# Altium PCB NODE.PcbDoc
Units mil, origin at the board's own origin, x right, y up, seen from the top; angles counter-clockwise.
Board outline 2180.03 x 2909.33 mil, 2 copper layers (Top Layer, Bottom Layer); 84 components, 58 nets, 273 pads, 85 vias.
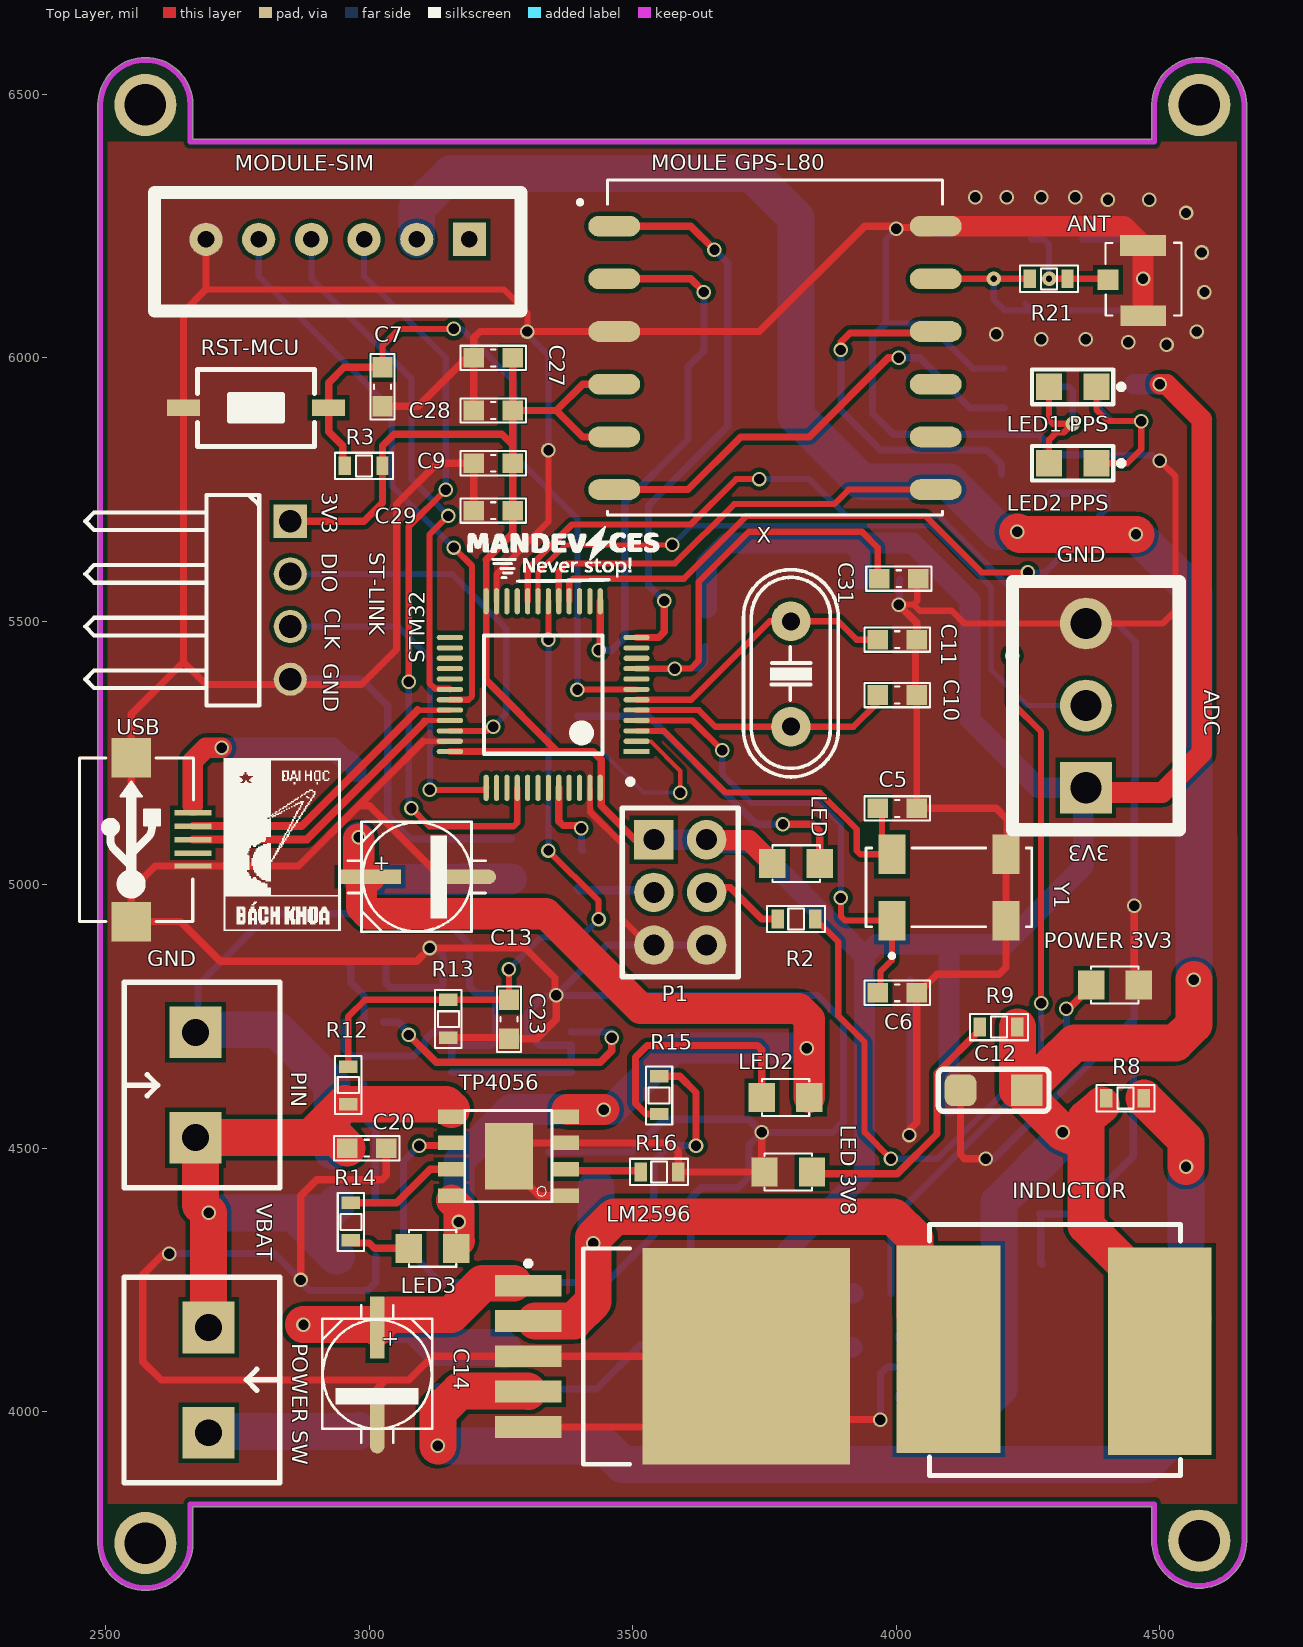
[diagram p0: Top Layer view]
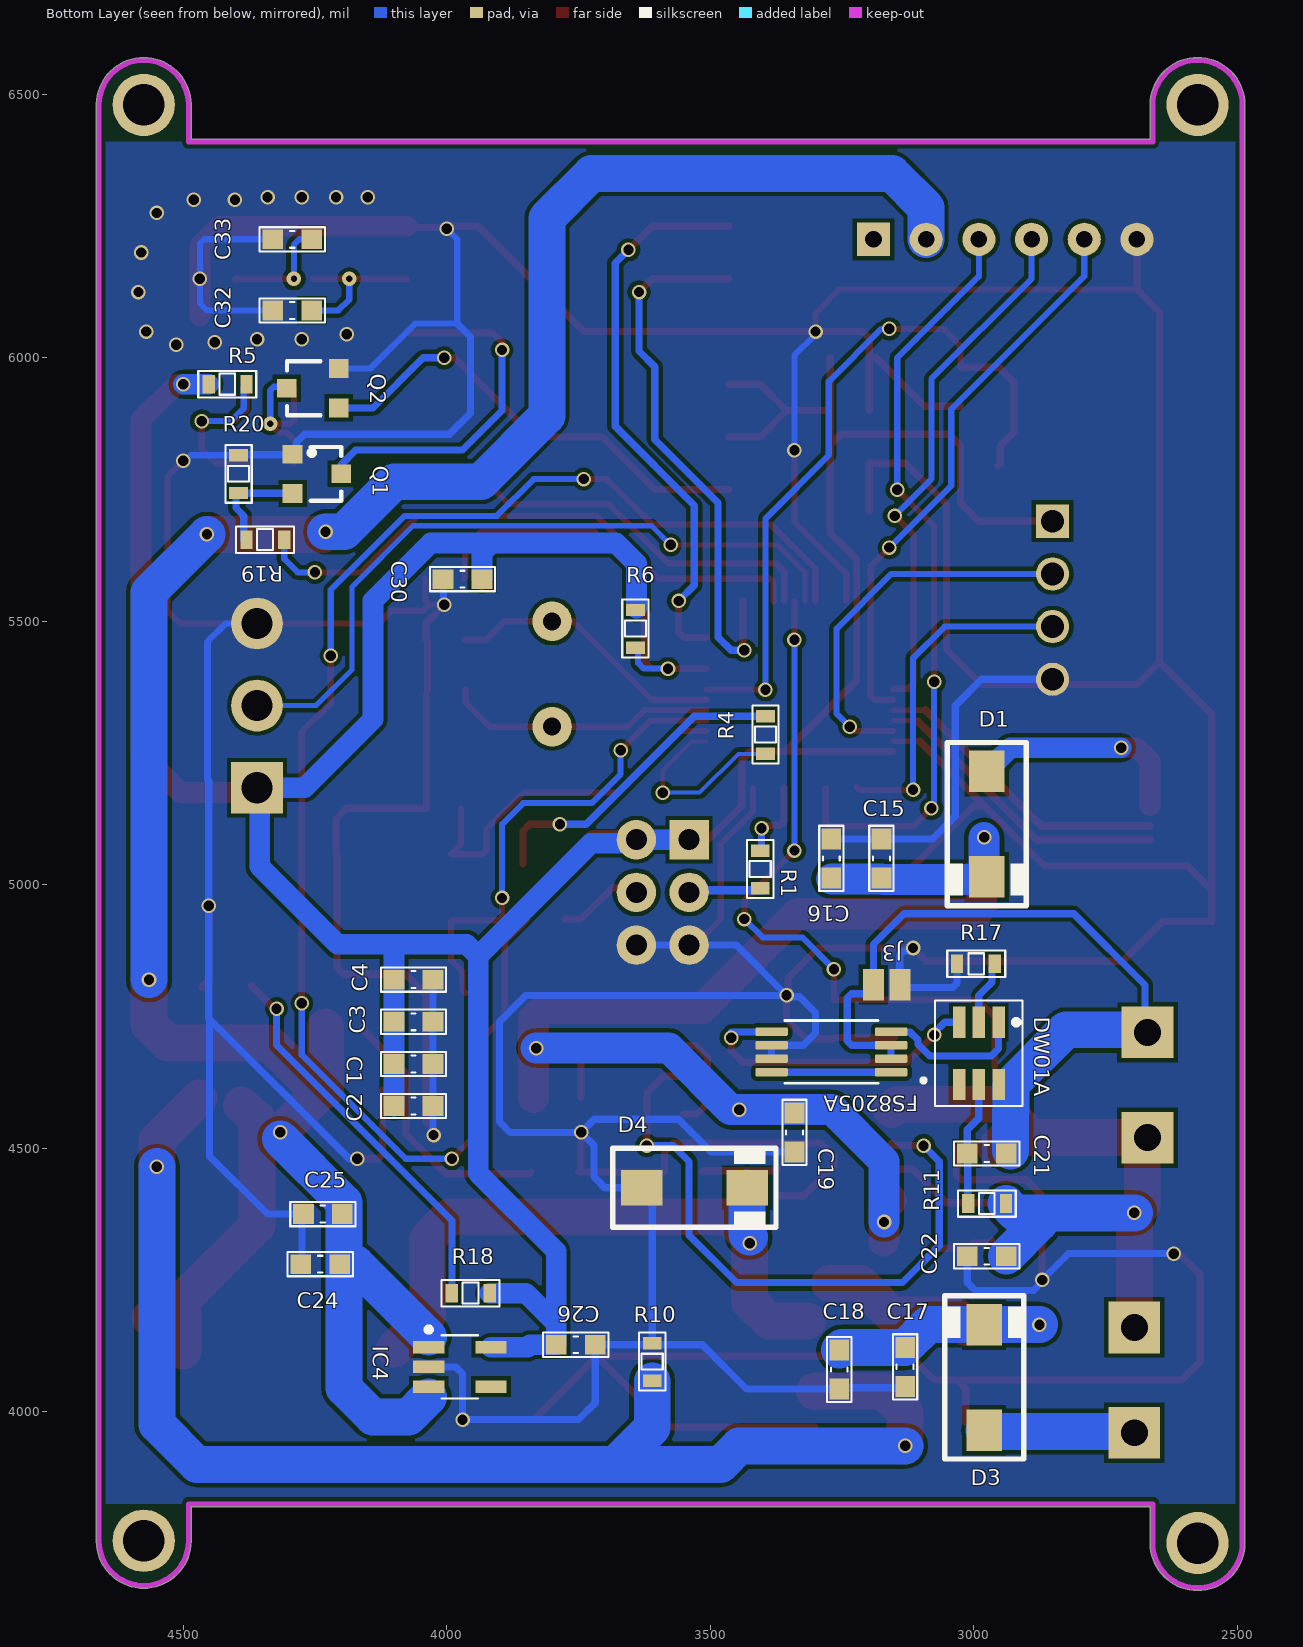
[diagram p1: Bottom Layer view, seen from below]
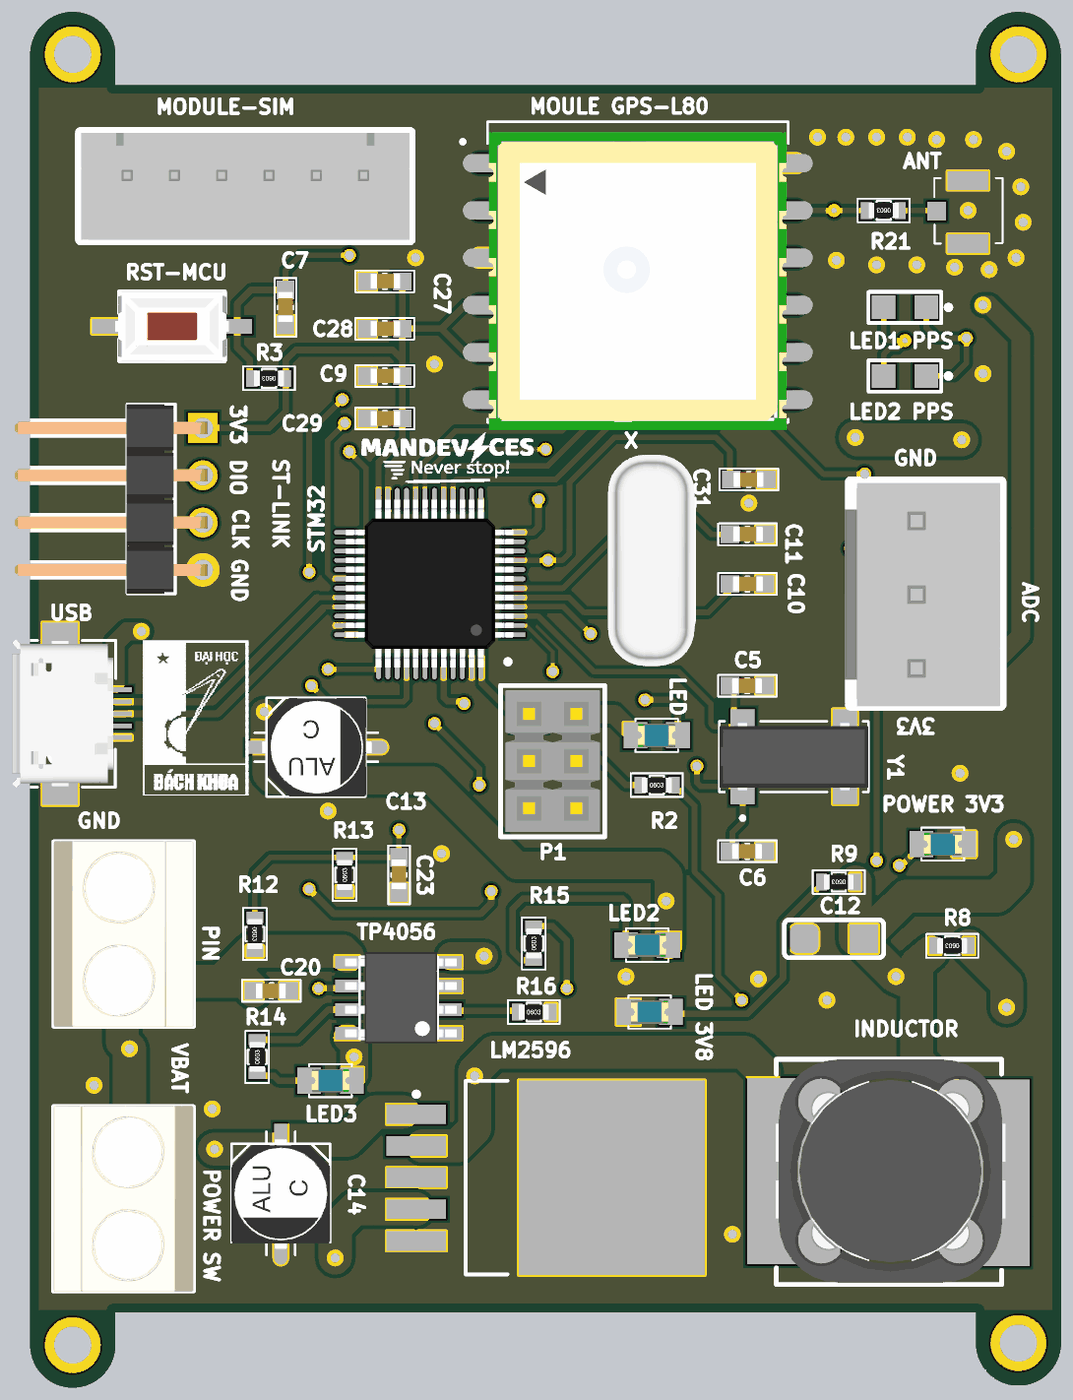
[diagram p2: 3D render of the assembled board from above, using the file's embedded part models]
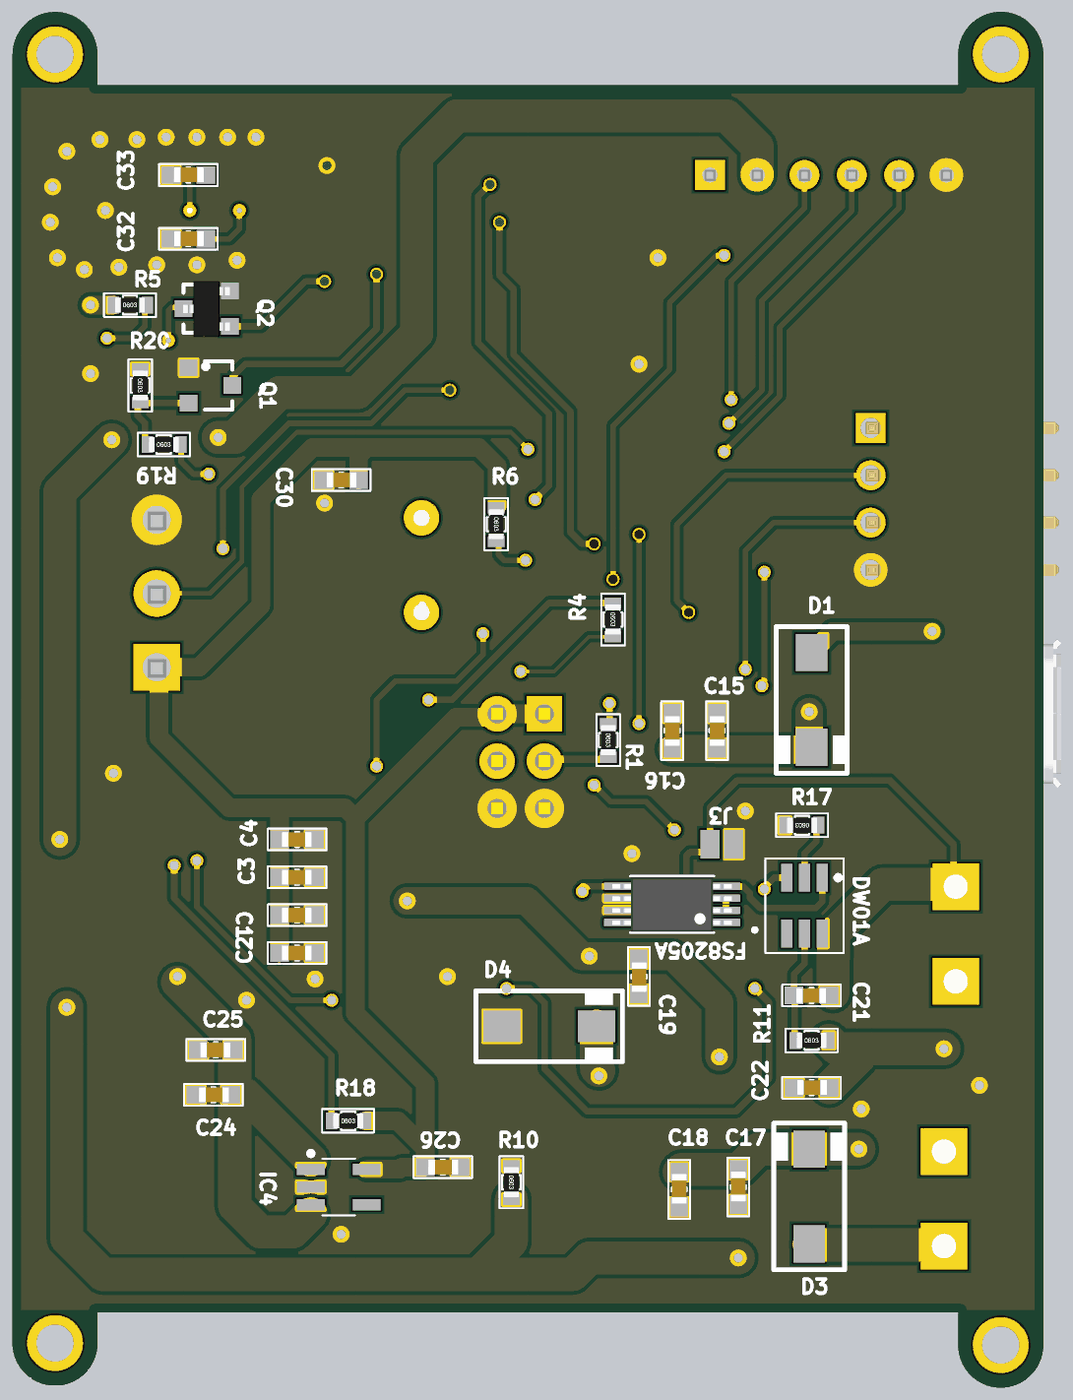
[diagram p3: 3D render of the assembled board from below, using the file's embedded part models]

## Layer stack, top to bottom
Top Solder: solder mask 0.4, Solder Resist, Dk 3.5
Top Layer: signal copper 1.4
Dielectric 1: dielectric 12.6, FR-4, Dk 4.8
Bottom Layer: signal copper 1.4
Bottom Solder: solder mask 0.4, Solder Resist, Dk 3.5

## Board outline
2484.99,3749.96 cw(c2490,3750) 2484.99,3750.16 2484.99,6480.65 cw(c2490,6480.65) 2484.99,6480.78 cw(c2575,6480) 2665.01,6480.74 cw(c2660,6480.7) 2665.01,6480.7 2665.01,6415.02 4484.98,6415.02 4484.98,6480.65 cw(c4490,6480.65) 4485.15,6481.93 cw(c4575,6480) 4664.85,6481.98 cw(c4660,6480.7) 4665.02,6480.7 4665.02,3754.35 cw(c4660,3754.35) 4665.01,3754.11 cw(c4575,3755) 4484.99,3754.06 cw(c4490,3754.3) 4484.98,3754.3 4484.98,3819.99 2665.01,3819.99 2665.01,3750.04 cw(c2660,3750.04) 2665.01,3749.77 cw(c2575,3750.7)

## Design rules (kind name [scope] priority, off if disabled: settings)
Clearance [All] p1: gap=7.87 ignorepadtopadclearanceinfootprint=TRUE
DiffPairsRouting [All] p1: maxlimit=10 minlimit=10 mostfreqgap=10 toplayer_minwidth=15 toplayer_maxwidth=15 toplayer_prefwidth=15 bottomlayer_minwidth=15 bottomlayer_maxwidth=15 bottomlayer_prefwidth=15 maxuncoupledlength=500
PolygonConnect [All] p1: connectstyle=Direct reliefconductorwidth=10 reliefentries=4 polygonreliefangle="90 Angle" airgapwidth=10
RoutingVias [All] p1: holewidth=11.81 width=27.56 viastyle="Through Hole" minholewidth=11.81 minwidth=27.56 maxholewidth=11.81 maxwidth=27.56
SolderMaskExpansion [All] p1: expansion=4
Width [All] p1: maxlimit=70 minlimit=7.87 preferedwidth=11.81 minimp=50.000000 maximp=50.000000 favimp=50.000000
29 further rules are at their usual default settings.

## Classes and differential pairs
component class 3.GPS: ANT C27 C28 C29 C33 "LED1 PPS" "LED2 PPS" "MOULE GPS-L80" Q1 Q2 R5 R19 R20 R21
component class 2.POWER_NODE: C12 C13 C14 C15 C16 C17 C18 C19 C20 C21 C22 C23 C24 C25 C26 D3 D4 DW01A FS8205A IC4 J3 L1 LED2 LED3 "LED 3V8" LM2596 PIN "POWER 3V3" R8 R9 R10 R11 R12 R13 R14 R15 R16 R17 R18 TP4056
component class 1.MCU_NODE: ADC C1 C2 C3 C4 C5 C6 C7 C9 C10 C11 C30 C31 CR D1 LED MODULE-SIM P1 R1 R2 R3 R4 R6 RST-MCU ST-LINK STM32 USB X Y1
differential pair USB: +USB_P -USB_N

## Components (designator, comment, footprint, x,y, rotation, side; value= is the part's Value field where it differs from the comment)
ADC "Header 3P VH3.96 Duc Thang" VH3.96M-3 4360,5262.05 r90 top (schematic designator H2)
ANT "IPX" IPXS 4418.22,6148.09 r180 top (schematic designator P2)
C1 "104,0603" CAP_0603 4063,4660 r0 bottom value=33p
C2 "104,0603" CAP_0603 4063,4580 r0 bottom value=33p
C3 "104,0603" CAP_0603 4063,4740 r0 bottom value=33p
C4 "104,0603" CAP_0603 4063,4820 r0 bottom value=33p
C5 "20pF,0603" CAP_0603 4001.82,5145 r180 top value=33p
C6 "20pF,0603" CAP_0603 4001.82,4795 r180 top value=33p
C7 "100nF,0603" CAP_0603 3025,5945 r90 top value=33p
C9 "104,0603" CAP_0603 3235,5800 r0 top value=33p
C10 "20pF,0603" CAP_0603 4001.82,5360 r0 top value=33p
C11 "20pF,0603" CAP_0603 4002,5465.16 r0 top value=33p
C12 "220uF" CAP_TANTALUM_3216 4185,4610 r180 top value=220uF,tantalum3216
C13 "470uF/63V,ALU-SMD-C" CAP-ALU-SMD-C 3091.47,5015 r0 top value="Cap 470uF/63V"
C14 "470uF/63V, ALU-SMD-C" CAP-ALU-SMD-C 3015,4070 r270 top value="Cap 470uF/63V"
C15 "4.7uF" CAP_0603 3175,5050 r270 bottom value=4.7uF,0603
C16 "4.7uF" CAP_0603 3270,5050 r270 bottom value=100nF,0603
C17 "4.7uF" CAP_0603 3130,4085 r90 bottom value=4.7uF,0603
C18 "4.7uF" CAP_0603 3255,4080 r90 bottom value=100nF,0603
C19 "100nF,0603" CAP_0603 3340,4530 r270 bottom value=33p
C20 "100nF,0603" CAP_0603 2995,4500 r180 top value=33p
C21 "100nF,0603" CAP_0603 2975,4490 r0 bottom value=33p
C22 "100nF,0603" CAP_0603 2975,4295 r180 bottom value=33p
C23 "100nF,0603" CAP_0603 3265,4745 r90 top value=33p
C24 "4.7uF" CAP_0603 4240,4280 r180 bottom
C25 "10nF" CAP_0603 4235,4375 r0 bottom value=10uF
C26 "10uF" CAP_0603 3755,4127 r180 bottom
C27 "4.7uF" CAP_0603 3235,6000 r0 top value=10uF,0603
C28 "4.7uF" CAP_0603 3235,5900 r0 top value=100nF,0603
C29 "4.7uF" CAP_0603 3235,5710 r0 top value=100nF,0603
C30 "1uF,0603" CAP_0603 3970,5580 r180 bottom value=33p
C31 "10nF,0603" CAP_0603 4005,5580.99 r180 top value=33p
C32 "106" CAP_0603 4292.98,6090 r180 bottom value=33p
C33 "106" CAP_0603 4293.08,6225 r180 bottom value=33p
D1 "M7" SMA 2975,5115 r270 bottom value=1N4007
D3 "M7" SMA 2980,4065 r90 bottom value=1N4007
D4 "SMA" SMA 3530,4425 r180 bottom
DW01A "DW01A" SOT23-6 2990,4680 r270 bottom (schematic designator IC2)
FS8205A "FS8205A" FS8205A 3270,4685 r0 bottom (schematic designator IC5)
IC4 "AP7335A-33W5-7" SOT23-5 3975,4085 r180 bottom
INDUCTOR "33uH" Inductor_SMD 4539.37,3878.78 r90 top value=220uH (schematic designator L1)
J3 "Jumper2" JUMPER2 3140,4810 r180 bottom
LED "LED" LED-0805-Blue 3765,5040 r0 top value="LED 3 ly Single Colour" (schematic designator LED1)
"LED1 PPS" "LED3" LED0805 4335,5945 r180 top (schematic designator LED5)
LED2 "LED" LED-0805-Blue 3835,4596.49 r180 top value="LED 3 ly Single Colour"
"LED2 PPS" "LED3" LED0805 4335,5800 r180 top (schematic designator LED4)
LED3 "LED" LED-0805-Blue 3165,4310 r180 top value="LED 3 ly Single Colour"
"LED 3V8" "3V8" LED-0805-Blue 3840,4455 r180 top value=Red (schematic designator PW1)
LM2596 "LM2596" TO-263 3537.83,4105 r0 top (schematic designator IC1)
MODULE-SIM "Header 6P 2.54 Duc Thang" XH2.54M-6 3190,6225 r180 top (schematic designator H1)
"MOULE GPS-L80" "L80-M39" XCVR_L80-M39 3770,6000 r0 top (schematic designator U3)
P1 "Header 3x2" "Header 3x2" 3540,5085.59 r270 top
PIN "JP2" KF2-5.08 2670,4620 r90 top (schematic designator J2)
"POWER 3V3" "LED 0805" LED-0805-Blue 4370,4810 r0 top value=Red (schematic designator PW2)
"POWER SW" "JP2" KF2-5.08 2695,4060 r270 top (schematic designator J4)
Q1 "2SC1815" SOT23 4246.26,5780 r270 bottom value=C1815
Q2 "2SC1815" SOT23-321 4254.21,5942.4 r90 bottom value=C1815
R1 "100k,0603" RES-SMD-0603 3405,5030 r270 bottom
R2 "100k,0603" RES-SMD-0603 3810,4935 r0 top
R3 "4k7,0603" RES-SMD-0603 2990,5795 r180 top
R4 "510R,0603" RES-SMD-0603 3395,5285 r270 bottom
R5 "330R,0603" RES-SMD-0603 4416.49,5950 r180 bottom
R6 "10R,0603" RES-SMD-0603 3641.82,5486.49 r270 bottom
R8 "10k,0603" RES-SMD-0603 4435,4595 r180 top value=10k
R9 "1k,0603" RES-SMD-0603 4195,4730 r180 top value=1k
R10 "4.7k,0603" RES-SMD-0603 3610,4095 r270 bottom value=3.3k
R11 "0.1k,0603" RES-SMD-0603 2975,4395 r180 bottom
R12 "30k,0603" RES-SMD-0603 2960,4620 r270 top
R13 "100k,0603" RES-SMD-0603 3150,4745 r90 top
R14 "1k,0603" RES-SMD-0603 2965,4360 r90 top
R15 "1k,0603" RES-SMD-0603 3549.95,4600 r90 top
R16 "1k2,0603" RES-SMD-0603 3550,4455 r0 top
R17 "1k,0603" RES-SMD-0603 2995,4850 r0 bottom
R18 "1k" RES-SMD-0603 3955,4225 r180 bottom
R19 "4k7,0603" RES-SMD-0603 4345,5655 r180 bottom
R20 "10k,0603" RES-SMD-0603 4395,5780 r270 bottom
R21 "0R,0603" RES-SMD-0603 4290,6150 r180 top
RST-MCU "SW" SW-SMD 2785,5905 r180 top value="SW chip 2 pin" (schematic designator SW1)
ST-LINK "Header4" JP4-D1C 2750,5340 r270 top (schematic designator C8)
STM32 "STM32" "LQFP 48" 3330,5360 r180 top (schematic designator U1)
TP4056 "TP4056" TP4056 3264,4485 r180 top (schematic designator IC3)
USB "USB-5" USB-M1 2665,5085.59 r90 top (schematic designator J1)
X "4Mhz" XT2 3800,5400 r270 top (schematic designator X1)
Y1 "MC-306_32.768K-E3" XTAL_MC-306_32.768K-E3 4100,4995 r90 top

## Footprints (in the part's own frame and the unit in brackets; to place one, negate y for a bottom-side part, rotate by r counter-clockwise, add the part's x,y. Pads: shape width x height; smd on the part's side, far side on the other; paste and mask are expansions set on the pad)
CAP-ALU-SMD-C [mm]
  rect 3x0.7 smd: 1(-2.286,0)
  oval 3x0.7 smd: 2(2.286,0)
  silkscreen extent -3.35,-2.65 3.28,2.65, body extent -2.95,-2.65 2.95,2.65, height 5.41
CAP_0603 [mm]
  rect 1x0.95 smd mask+0.076: 1(-0.94,0) 2(0.94,0)
  silkscreen extent -1.57,-0.58 1.57,0.58, body extent -0.77,-0.39 0.83,0.41, height 0.9
CAP_TANTALUM_3216 [mil]
  rect 60x60 smd: 1(-62.99,0)
  rrect50% 60x60 smd: 2(62.99,0)
  silkscreen extent -105,-40 105,40, body extent -67,-35 67,35, height 67
FS8205A [mm]
  rrect25% 1.56x0.4 smd: 1(-2.88,1.031) 2(-2.88,0.381) 3(-2.88,-0.269) 4(-2.88,-0.919) 5(2.88,-0.919) 6(2.88,-0.269) 7(2.88,0.381) 8(2.88,1.031)
  silkscreen extent -4.54,-1.46 2.25,1.57, body extent -3.2,-1.4 3.2,1.53, height 1.2
"Header 3x2" [mil] "Connector; Header; 6 Position; 2 Row; Solder Pad 35mil"
  rect 75x75 hole 40: 1(0,0)
  round 75 hole 40: 2(0,100) 3(100,0) 4(100,100) 5(200,0) 6(200,100)
  silkscreen extent -60,-60 260,160, body extent -50,-50 250,150, height 83
Inductor_SMD [mm]
  rect 10x5 smd: 1(6.096,11.176) 2(6,1)
  silkscreen extent 0,0 12.1,12.1, body extent 0.1,-0.2 12.1,12.14, height 7.15
IPXS [mm] "SOT 23 _ 1-3-2"
  rect 1x1 smd: 1(0.415,-0.01)
  rect 2.2x1 smd: 2(-1.273,-1.658) 3(-1.278,1.73)
  silkscreen extent -3.13,-1.79 0.53,1.73, body extent -2.83,-1.49 0.31,1.56, height 1.55
JP4-D1C [mm] "4 pins, 1 row, right angled, gold plating"
  rect 1.6x1.6 hole 1.1: 1(-8.89,2.54)
  round 1.6 hole 1.1: 2(-6.35,2.54) 3(-3.81,2.54) 4(-1.27,2.54)
  silkscreen extent -10.16,-7.34 0,1.04, body extent -10.16,-7.57 0,2.79, height 2.54
JUMPER2 [mil]
  rect 40x60 smd: 1(-50,0) 2(0,0)
KF2-5.08 [mm]
  rect 2.5x2.5 hole 1.3: 1(-2.54,0) 2(2.54,0)
  silkscreen extent -4.95,-4.08 4.95,3.43, body extent -5,-4.07 5,3.43, height 10
LED0805 [mil] "Chip Resistor; Body 2.0 x 1.3 mm (LxW typ)"
  rect 50x50 smd: 1(-45,0) 2(45,0)
  silkscreen extent -97,-33 77,33, body extent -60,-25 60,25, height 47
LED-0805-Blue [mil]
  rect 50x55 smd: 1(0,0) 2(90,0)
  silkscreen extent 0,-35 90,35, body extent 5,-25 85,25, height 43
"LQFP 48" [mm]
  rect 1.27x0.25 smd: 1(-4.498,2.725)
  oval 1.27x0.25 smd: 2(-4.498,2.225) 3(-4.498,1.725) 4(-4.498,1.225) 5(-4.498,0.725) 6(-4.498,0.225) 7(-4.498,-0.275) 8(-4.498,-0.775) 9(-4.498,-1.275) 10(-4.498,-1.775) 11(-4.498,-2.275) 12(-4.498,-2.775) 25(4.498,-2.775) 26(4.498,-2.275) 27(4.498,-1.775) 28(4.498,-1.275) 29(4.498,-0.775) 30(4.498,-0.275) 31(4.498,0.225) 32(4.498,0.725) 33(4.498,1.225) 34(4.498,1.725) 35(4.498,2.225) 36(4.498,2.725)
  oval 0.25x1.27 smd: 13(-2.75,-4.524) 14(-2.25,-4.524) 15(-1.75,-4.524) 16(-1.25,-4.524) 17(-0.75,-4.524) 18(-0.25,-4.524) 19(0.25,-4.524) 20(0.75,-4.524) 21(1.25,-4.524) 22(1.75,-4.524) 23(2.25,-4.524) 24(2.75,-4.524) 37(2.75,4.473) 38(2.25,4.473) 39(1.75,4.473) 40(1.25,4.473) 41(0.75,4.473) 42(0.25,4.473) 43(-0.25,4.473) 44(-0.75,4.473) 45(-1.25,4.473) 46(-1.75,4.473) 47(-2.25,4.473) 48(-2.75,4.473)
  silkscreen extent -4.33,-2.88 2.85,4.3, body extent -4.5,-4.53 4.5,4.47, height 1.5
RES-SMD-0603 [mm]
  rect 0.6x0.9 smd: 1(-0.889,0) 2(0.927,0)
  silkscreen extent -1.4,-0.64 1.4,0.64, body extent -0.8,-0.4 0.8,0.4, height 0.43
SMA [mm]
  rect 2x1.7 smd: 1(-2.544,0) 2(2.544,0)
  silkscreen extent -3.94,-1.9 3.94,1.91, body extent -2.87,-1.4 2.87,1.4, height 2.29
SOT23 [mm] "SOT-23; 3 Leads; Body 3.1 x 2.5 mm, inc. leads (LxW max), Alternate Lead Configuration"
  rect 0.9x0.95 smd: 1(-0.95,-1.175) 2(0,1.175) 3(0.95,-1.175)
  silkscreen extent -1.3,-0.38 1.3,1.18
SOT23-5 [mm] "SOT23, 5-Leads, Body 3.0x3.0mm (max), Pitch 0.95mm, IPC Medium Density"
  rect 1.5x0.6 smd: 1(-1.5,0.95) 2(-1.5,0) 3(-1.5,-0.95) 4(1.5,-0.95) 5(1.5,0.95)
  silkscreen extent -1.63,-1.52 0.87,1.92, body extent -1.75,-1.52 1.75,1.53, height 1.45
SOT23-6 [mm] "SOT23, 5-Leads, Body 3.0x3.0mm (max), Pitch 0.95mm, IPC Medium Density"
  rect 1.5x0.6 smd: 1(-1.5,0.95) 2(-1.5,0) 3(-1.5,-0.95) 4(1.5,-0.95) 5(1.5,0) 6(1.5,0.95)
  silkscreen extent -2.54,-2.11 2.54,2.11, body extent -1.75,-1.52 1.75,1.53, height 1.45
SOT23-321 [mm]
  rect 0.9x0.95 smd mask+0: 1(0.95,-1.25)
  rect 0.9x0.95 smd: 2(0,1.25) 3(-0.95,-1.25)
  silkscreen extent -1.3,-0.38 1.3,1.25, body extent -1.52,-1.23 1.48,1.27, height 1.06
SW-SMD [mm] "Switch SMD type"
  rect 1.6x0.8 smd: 1(-3.5,0) 2(3.5,0)
  silkscreen extent -2.82,-1.85 2.82,1.85, body extent -3.05,-1.85 3.05,1.85, height 2.5
TO-263 [mm]
  rect 3.2x1.05 smd: 1(-6,3.4) 2(-6,1.7) 3(-6,0) 4(-6,-1.7) 5(-6,-3.4)
  rect 10x10.45 smd: 6(4.5,0)
  silkscreen extent -6.12,-5.2 -1.1,5.2, body extent -6.58,-5.2 7.57,5.2, height 4.65
TP4056 [mm]
  rect 1.3x0.7 smd: 1(-2.75,1.905) 2(-2.75,0.635) 3(-2.75,-0.635) 4(-2.75,-1.905) 5(2.75,-1.905) 6(2.75,-0.635) 7(2.75,0.635) 8(2.75,1.905)
  rect 2.3x3.2 smd: 3(-0.025,0)
  silkscreen extent -2.1,-2.2 2.1,2.2, body extent -3.13,-2.45 2.87,2.45, height 1.75
USB-M1 [mil]
  rect 10x70 smd: 1(51.18,0) 2(25.59,0) 3(0,0) 4(-25.59,0) 5(-50,0)
  rect 74.8x74.8 smd: 5(-155.51,116.84) 5(155.51,116.84)
  silkscreen extent -155,-1 155,215, body extent -157,5 158,218, height 107
VH3.96M-3 [mm]
  rect 2.5x2.5 hole 1.5: 1(-1.98,0)
  round 2.5 hole 1.5: 2(1.98,0) 3(5.94,0)
  silkscreen extent -4,-4.5 7.96,3.54, body extent -4.08,-4.49 7.92,3.88, height 10.26
XCVR_L80-M39 [mm]
  oval 2.5x1 smd paste-2: 1(-7.75,6.35) 2(-7.75,3.81) 3(-7.75,1.27) 4(-7.75,-1.27) 5(-7.75,-3.81) 6(-7.75,-6.35) 7(7.75,-6.35) 8(7.75,-3.81) 9(7.75,-1.27) 10(7.75,1.27) 11(7.75,3.81) 12(7.75,6.35)
  silkscreen extent -9.5,-7.57 8.08,8.57, body extent -8,-8 8,8, height 7.05
XH2.54M-6 [mm]
  rect 1.6x1.6 hole 0.8: 1(0,0)
  round 1.6 hole 0.8: 2(2.54,0) 3(5.08,0) 4(7.62,0) 5(10.16,0) 6(12.7,0)
  silkscreen extent -2.48,-2.26 15.18,3.46, body extent -2.48,-2.26 15.18,3.48, height 6.91
XT2 [mil] "Footpin for Crystal 2 pin"
  round 75 hole 34: 1(-100,0) 2(100,0)
  silkscreen extent -198,-90 195,90, body extent -233,-93 213,90, height 138
XTAL_MC-306_32.768K-E3 [mm]
  rect 1.9x1.3 smd: 1(-1.6,2.75) 2(-1.6,-2.75) 3(1.6,-2.75) 4(1.6,2.75)
  silkscreen extent -3.4,-4 1.9,4, body extent -1.85,-4 1.85,4, height 2.54

## Part data
ADC MODULE-SIM: "C?m", Chung_Loai=C?m, Don_Vi=Con
  ADC: Ma_Hang=MH001292, Ten_Linh_Kien="Header 3P XH2.54-3P Ð?c Th?ng"
  MODULE-SIM: Ma_Hang=MH001972, Ten_Linh_Kien="Header 6P XH2.54-6P Ð?c Th?ng"
ANT: library part IPXSx66, "Antenna GSM GPS", Manufacturer="TE Connectivity AMP Connectors", Package=SMD, Part Number=2334884-1, Category=Connectors, User_Description="UMCC MICRO-COAX RECEPTACLE, GEN"
C1 C2 C3 C4 C5 C6 C7 C9 C10 C11 C19 C20 C21 C22 C23 C30 C31 C32 C33: library part CapSMD, "Capacitor", LatestRevisionDate=17-Jul-2002, LatestRevisionNote="Re-released for DXP Platform.", PackageReference=RAD-0.3, Published=8-Jun-2000, Publisher="Altium Limited"
C12: library part CP5, "220µF Molded Tantalum Polymer Capacitor 16V 2917 (7343 Metric) 40mOhm @ 100kHz", Manufacturer="AVX Corporation", Package=2917, Part Number=TCME227M016R0040E, Category=CAPACITOR, User_Description="CAP TANT POLY 220UF 16V 2917"
C13 C14: library part CP3, "Cap 470uF/63V"
C15 C16 C17 C18 C24 C27 C28 C29: library part C, "4.7µF ±10% 35V Ceramic Capacitor X5R 0805 (2012 Metric)", Manufacturer="Samsung Electro-Mechanics", Package=0805, Part Number=CL21A475KLCLQNC, Category=CAPACITOR, User_Description="CAP CER 4.7UF 35V X5R 0805"
C25 C26: library part C, "Cap SMD", Manufacturer="Samsung Electro-Mechanics", Package=0805, Part Number=CL21A106KPFNNNG, Category=CAPACITOR, User_Description="CAP CER 10UF 10V X5R 0805"
D1 D3: library part D1A, "Diode 1A"
D4: library part "Diode Zener", "Zener Diode", LatestRevisionDate=17-Jul-2002, LatestRevisionNote="Re-released for DXP Platform.", PackageReference=DIODE-0.7, Published=8-Jun-2000, Publisher="Altium Limited"
DW01A: "One Cell Lithium-ion/Polymer Battery Protection IC"
IC4: Package=SOT23-5, Part Number=AP7335A-33W5-7
INDUCTOR: library part L1, "22µH Shielded Inductor 1.65A 96mOhm Max Nonstandard", Manufacturer="Bourns Inc.", Package=SMD, Part Number=SRR0745A-220M, Category=INDUCTORS, User_Description="FIXED IND 22UH 1.65A 96 MOHM SMD"
J3: "Jumper, 2-Pin"
LED LED2 LED3: "LED Single colour Green and Red"
"LED1 PPS" "LED2 PPS": library part LED0805, "LED SMD 0805"
"LED 3V8" "POWER 3V3": library part LED, "LED RED DIFFUSED 0805 SMD", Manufacturer="OSRAM Opto Semiconductors Inc.", Package=0805, Part Number="LS R976-NR-1", Category="LED SMD", User_Description="LED RED DIFFUSED 0805 SMD"
LM2596: library part LM2576, "LM2576"
"MOULE GPS-L80": "L80 is an ultra compact GPS POT (Patch on Top) module with an embedded 15.0mm × 15.0mm × 4.0mm patch antenna.", Package=None, Availability=Warning, Check_prices=https://www.snapeda.com/parts/L80-M39/Quectel/view-part/51186/?ref=eda, MF=Quectel, MP=L80-M39, Price=None, Purchase-URL=https://pricing.snapeda.com/search/part/L80-M39/?ref=eda, SnapEDA_Link=https://www.snapeda.com/parts/L80-M39/Quectel/view-part/51186/?ref=snap
P1: "Header, 6-Pin, 2-Row", LatestRevisionDate=17-Jul-2002, LatestRevisionNote="Re-released for DXP Platform.", Publisher="Altium Limited"
PIN "POWER SW": "WR-PHD 2.54 mm Angled Socket Header", Manufacturer="W¨¹rth Elektronik eiSos GmbH", partNo=613002143121, ComponentLink1 Description=Manufacturer, ComponentLink1URL=http://www.we-online.com, ComponentLink2 Description=Datasheet, ComponentLink2URL=http://katalog.we-online.de/em/datasheet/6130xx143121.pdf, Created by="Karrer Zheng", Created Date="29 March 2013", NoPins=02
Q1 Q2: "NPN 600mW, ECB"
  Q1: =C828
  Q2: =C2383
R1 R2 R3 R4 R5 R6 R11 R12 R13 R14 R15 R16 R17 R19 R20 R21: library part "Resistor - SMD", "Resistor SMD", Manufacturer="Generic Components", Class=Passive, Published=08/06/2000, Publisher="Altium Hobart Technology Centre"
R8: library part R, "RES SMD 10K OHM 1% 1/8W 0805", Manufacturer=Yageo, Package=0805, Part Number=RC0805FR-0710KL, Category=RESISTORS, User_Description="RES SMD 10K OHM 1% 1/8W 0805"
R9 R18: library part R, "Resistor 1/4W", Manufacturer=Yageo, Package=0805, Part Number=RC0805FR-071KL, Category=RESISTORS, User_Description="RES SMD 1K OHM 1% 1/8W 0805"
R10: library part R, "RES SMD 3.3K OHM 1% 1/8W 0805", Manufacturer=Yageo, Package=0805, Part Number=RC0805FR-073K3L, Category=RESISTORS, User_Description="RES SMD 3.3K OHM 1% 1/8W 0805"
RST-MCU: library part SW2, "Switch button 2 pin"
ST-LINK: "Header IDC, 4 x 1 Pin Vertical 2.54mm Pitch (Non-Boxed, Male)", Manufacturer="W¨¹rth Elektronik eiSos GmbH", partNo=613002143121, ComponentLink1 Description=Manufacturer, ComponentLink1URL=http://www.we-online.com, ComponentLink2 Description=Datasheet, ComponentLink2URL=http://katalog.we-online.de/em/datasheet/6130xx143121.pdf, Created by="Karrer Zheng", Created Date="29 March 2013", NoPins=02
STM32: library part STM32F103C8T6, "STM32 ARM-based 32-bit MCU with 64 Kbytes Flash, 64-pin LQFP, Industrial Temperature"
TP4056: "Complete single cell Li-Ion battery with a constant current / constant voltage linear charger"
USB: Manufacturer=FCI, Manufacturer Part Number=10118193-0001LF, Supplier Part Number 1=609-4616-1-ND, .Checked PCB=RF, .Checked SCH=MM, .Creator=MM, Category="Connectors, Interconnects", ComponentLink1Description=http://portal.fciconnect.com/Comergent//fci/drawing/10118193.pdf, ComponentLink1URL=http://portal.fciconnect.com/Comergent//fci/drawing/10118193.pdf, Connector Type="USB - micro B", Features="Shielded, Solder Retention", Gender=Receptacle, Ingress Protection=-, Mounting Type="Surface Mount, Right Angle, Horizontal", Number of Contacts=5, Packaging="Cut Tape (CT)", Pricing 1="1=0.46, 10=0.433, 25=0.3712, 50=0.3156, 100=0.3032, 250=0.27224, 500=0.25988 (USD)", RoHS="RoHS Compliant", Specifications="USB 2.0", Stock 1=28642, Supplier 1=Digi-Key
X: library part XT2, "Crystal For all Crystal 2pin."
Y1: "CRYSTAL 32.7680KHZ 6PF SMD", Package="NON STANDARD-4 EPSON", Availability="In Stock", Check_prices=https://www.snapeda.com/parts/MC-306%2032.768K-E3/EPSON/view-part/?ref=eda, MF=EPSON, MP="MC-306 32.768K-E3", Price=None, Purchase-URL="https://pricing.snapeda.com/search/part/MC-306 32.768K-E3/?ref=eda", SnapEDA_Link=https://www.snapeda.com/parts/MC-306%2032.768K-E3/EPSON/view-part/?ref=snap

## Free pads (board coordinates)
  round 118.11 hole 78.74: 0(2575,3750.7) 0(2575,6480) 0(4575,3755) 0(4575,6480)

## Via types
v1: diameter 27.56, hole 19.68, Top Layer to Bottom Layer, 82 vias
v2: diameter 27.56, hole 11.81, Top Layer to Bottom Layer, 3 vias

## Nets (pads, with @x,y where several pads share a name; then routed paths per layer and width w, separated by ;. In a path a pad name is that pad's centre, name@x,y a point inside that pad or via, vN(x,y) a via of type N, cw(c..) or ccw(c..) an arc to the next point about the centre after c; other vN are vias at no path point)
3V3: "MOULE GPS-L80.4" "MOULE GPS-L80.5" ADC.1 C1.2 C2.2 C3.2 C4.2 C9.2 C26.1 C27.2 C28.2 C29.2 C30.2 IC4.5 LED.1 P1.1 P1.2 R3.1 R5.1 R6.1 R18.2 ST-LINK.1 STM32.24 STM32.36 STM32.48 | length 7162.2
  Top Layer w11.81: 3221.73,5388.27 STM32.24 3221.73,5616.73
  Top Layer w13.78: ST-LINK.1 2990,5690 3025,5725 R3.1 3025,5833.39 3046.62,5855 3252,5855 3272,5835 ; STM32.36 3357.27,5252.73 ; 3221.73,5388.27 3357.27,5252.73 ; 3221.73,5616.73 3272,5667 C29.2 C9.2 3272,5835 ; C27.2 C28.2 ; 3464.88,5850 3405,5850 3355,5900 ; 3464.88,5950 3405,5950 3355,5900 ; P1.1 3504.41,5085.59 3440.24,5149.76 3440.24,5237.5 3425,5252.73 3357.27,5252.73 ; 3272,5835 C28.2 ; C28.2 3355,5900
  Top Layer w39.37: P1.2 3640.96,5084.63 3720.37,5084.63 LED.1 ; ADC.1 4369.09,5175 4505,5175 4580,5250 4580,5883.01 4513.01,5950 v1(4500,5950)
  Bottom Layer w39.37: P1.1 P1.2 3646.82,5078.77 3726.16,5078.77 3940,4864.93 ; R6.1@3640,5525 3640,5610 3678.82,5648.82 3915,5648.82 ; IC4.5 3846.53,4122.4 3841.93,4127 C26.1 3792,4167 ; R18.2 3850,4225 3792,4167 ; C30.2 3933,5630.82 3915,5648.82 ; C2.2 C1.2 C3.2 C4.2 4100,4886.93 ; ADC.1 4269.97,5184.09 4140,5314.07 4140,5539.07 4030.25,5648.82 3915,5648.82 ; ADC.1@4369.09,5184.09 4355,5170 4355,5035 4206.93,4886.93 4100,4886.93 ; R5.1 v1(4500,5950) ; 3792,4167 3792,4304.32 3940,4452.32 3940,4864.93 ; 3940,4864.93 3962,4886.93 4100,4886.93
3V8: C12.1 C24.2 C25.1 IC4.1 IC4.3 INDUCTOR.2 MODULE-SIM.2 R8.2 R9.1 | length 5162.9
  Top Layer w70: R9.1 4230,4610 C12.1@4240.98,4605 ; v1(4230,5670) 4235,5665 v1(4455,5665) ; R8.2@4390,4581.7 4360,4556.48 4360,4510.46 ; INDUCTOR.2@4562.87,4177.87 INDUCTOR.2 4500,4213.43 4360,4353.43 4360,4510.46 ; v1(4565,4820) 4565,4735 4530,4700 4337.99,4700 4247.06,4610.95 C12.1@4240.98,4605 ; C12.1@4240.98,4605 v1(4315.98,4530) 4360,4510.46
  Bottom Layer w70: MODULE-SIM.2 3090,6285 3155,6350 3725,6350 3810,6265 3810,5890 3935,5765 4100,5765 4195,5670 v1(4230,5670) ; 4034.06,4028.19 4072.24,3990 4140,3990 4195,4045 C24.2@4195,4280 ; 4034.06,4141.81 4172.24,4280 C24.2@4195,4280 ; v1@4315.98,4518 4195,4397.02 C24.2@4195,4280 ; v1(4455,5665) 4565,5555 v1(4565,4820)
5V: C13.1 C15.2 C16.2 C19.1 D1.2 LED2.1 LED3.1 TP4056.4 TP4056.8 | length 2611.3
  Top Layer w59.06: C13.1@2980,5020 v1@2980,5087 ; C13.1 2990.91,5015 2985,5009.09 2985,4958.06 2998.06,4945 3335,4945 3515,4765 3815,4765 3835,4745 LED2.1 ; TP4056.8@3155.73,4401.22 3170,4386.95 v1(3170,4360) 3170,4325 LED3.1@3170.73,4324.27 ; TP4056.4@3375,4573.15 v1(3445,4573.15)
  Bottom Layer w59.06: v1(2980,5090) 2980,5009.84 3171.84,5009.84 3175,5011 C16.2@3270,5011 ; v1(3170,4360) 3170,4475.03 3268.12,4573.15 3340,4573.15 v1(3445,4573.15) 3461.42,4573.15 3578.27,4690 v1(3830,4690)
ADC2: ADC.2 STM32.19 | length 1364.5
  Top Layer w9.84: STM32.19 3320.16,5592.79 3325.92,5598.56 3372.36,5645 v1(3575,5645)
  Bottom Layer w9.84: v1(3575,5645) 3611.3,5681.3 4063.7,5681.3 4180,5565 4180,5408 4248,5340 ADC.2
ANT: MODULE-SIM.1
BOOT0: R1.1 STM32.44 | length 155.3
  Top Layer w13.78: STM32.44 3359.53,5120.47 3367.6,5112.4 3397.6,5112.4 v1(3402.5,5107.5)
  Bottom Layer w13.78: v1(3402.5,5107.5) 3402.5,5067.5 R1.1
BOOT1: R2.2 STM32.20 | length 2925.4
  Top Layer w11.81: STM32.20 3300.47,5599.56 3384.65,5683.73 3609.89,5683.73 3696.16,5770 v1(3740,5770) ; R2.2 3890,4891.49 3890,4751.25 3940,4701.25 3940,4530 v1(3990,4480) ; v1(4220,5435) 4220,5345 4275,5290 v1(4275,4775)
  Bottom Layer w11.81: v1(3740,5770) 3835,5770 3905,5700 4080,5700 4220,5560 v1(4220,5435) ; v1(3990,4480) 4078.01,4480 4275,4676.99 v1(4275,4775)
EX_ANT: "MOULE GPS-L80.11" C32.2 R21.2 | length 314.7
  Top Layer w11.81: 4076.25,6148.87 4077.38,6150 v2(4185,6150) R21.2
  Bottom Layer w11.81: v2(4185,6150) 4185,6110.67 4205.67,6090 C32.2 ; C32.2@4245.1,6102.8 C32.2@4257.9,6090
GND: "LED 3V8.2" "MOULE GPS-L80.3" "MOULE GPS-L80.12" "POWER 3V3.2" ADC.3 ANT.2 ANT.3 C1.1 C2.1 C3.1 C4.1 C5.1 C6.1 C7.1 C9.1 C10.2 C11.2 C12.2 C13.2 C14.2 C15.1 C16.1 C17.1 C18.1 C19.2 C20.1 C22.1 C23.1 C24.1 C25.2 C26.2 C27.1 C28.1 C29.1 C30.1 C31.1 C32.1 C33.1 D4.1 FS8205A.6 FS8205A.7 IC4.2 J3.2 LM2596.3 LM2596.5 LM2596.6 MODULE-SIM.6 P1.5 P1.6 Q1.1 Q2.1 R10.1 R13.1 R16.2 R17.2 R20.1 RST-MCU.2 ST-LINK.4 STM32.23 STM32.35 STM32.47 TP4056.1 TP4056.3 USB.5 Y1.2 Y1.3 | length 22594.8
  Top Layer w9.84: 3102.42,5272.42 STM32.35
  Top Layer w11.81: 2690,6130 3255,6130 3300,6085 v1(3300,6050) ; STM32.23 3241.42,5590 3340,5688.58 v1(3340,5825) ; STM32.47 3418.58,5139.05 3480,5077.63 3480,4935 3529.41,4885.59 P1.5 ; v1(4005,5531.16) 4005.59,5531.75 4033.08,5531.75 ; C5.1 C10.2 ; C31.1 4040,5578.99 4040,5538.67 4033.08,5531.75 ; v1(4500,5805) 4530,5775 4530,5520 4505.91,5495.91 ADC.3 4129.09,5495.91 4105,5520 4044.83,5520 4033.08,5531.75
  Top Layer w13.78: v1(2620,4300) 2610,4300 2570,4260 2570,4095 2605,4060 3031.49,4060 ; MODULE-SIM.6 2690,6130 2647.2,6087.2 RST-MCU.2 2647.2,5422.8 ; v1(2870,4250) 2870,4410 2900,4440 3023.93,4440 3032,4448.07 C20.1 ; C14.2 3015,4043.51 3031.49,4060 ; C7.1 3093,5908 3185,6000 C27.1 ; 3102.42,5272.42 3025,5195 2979.76,5149.76 ; R13.1 3263,4710 C23.1 3318,4708 3355,4745 v1(3355,4790) 3352.36,4792.64 3352.36,4823.01 3295.38,4880 v1(3115,4880) 3090,4855 2717.2,4855 2642.13,4930.08 2548.16,4930.08 2548.16,4990 ; C13.2 3135,5015 3000.24,5149.76 2979.76,5149.76 ; C29.1 C9.1 3129.1,5800 3051.58,5722.48 3051.58,5446.58 2985,5380 2690,5380 2647.2,5422.8 ; C28.1 C27.1 ; LM2596.5 3581.14,3971.14 LM2596.6 ; TP4056.1 3322.28,4410 3265,4467.28 3265,4485 3290,4510 3372.27,4510 3569.87,4510 3586.48,4493.39 R16.2 3750,4455 3745,4460 v1(3745,4530) ; v1(3970,3985) 3835,3985 LM2596.6 ; v1(4000,6245) 4002.5,6247.5 4072.62,6247.5 4075.12,6250 ; v1@4000,6250 3940,6250 3740,6050 3464.88,6050 v1(3300,6050) 3210,6050 3198,6038 C27.1 ; v1(4005,5531.16) 4039,5497.16 C11.2 4036.5,5462.66 C10.2@4036.5,5370 ; v1(4025,4525) 4025,4535 4038.82,4548.82 C6.1 4042.5,4795 4077.5,4830 4195,4830 4208.27,4843.27 Y1.2 Y1.3 4210,5059.72 4210,5125 4190,5145 C5.1 ; C12.2 4122.01,4487.99 4129.97,4480.03 v1(4170,4480.03) ; v1(4451.49,4960) 4451.49,4818.51 4460,4810 4465,4805 ; 2548.16,4990 2548.16,5241.1 2548.16,5323.75 2647.2,5422.8 ; 2548.16,4990 2593.75,5035.59 2665,5035.59 2865.59,5035.59 2979.76,5149.76 ; 3031.49,4060 3075,4060 3120,4105 LM2596.3 LM2596.6
  Top Layer w39.37: 4075.12,6250 4431.7,6250 ANT.2 4468.44,6213.37 v1(4468.44,6150) ANT.3@4468.44,6080.1
  Bottom Layer w11.81: v1(3300,6050) 3300,6044.67 3340,6004.67 v1(3340,5825) ; v1(4000,6245) 3980,6225 3980,6065 4060,6065 4145.2,5979.8 Q2.1 ; C32.1 4455,6090 4468.44,6103.44 v1(4468.44,6150) 4468.44,6216.56 4460,6225 4352.98,6225 ; ADC.3 4419.09,5495.91 4454.09,5460.91 ; R20.1 4485.74,5815 4495.74,5805 v1(4500,5805)
  Bottom Layer w13.78: v1@2625,4300 2820,4300 v1(2870,4250) 2870,4246.27 2886.27,4230 2997,4230 3012,4245 C22.1 ; ST-LINK.4 2985,5390 3035,5340 3035,5130 3078,5087 C15.1 C16.1 ; R17.2 3031.49,4813.07 3039.56,4805 3135,4805 J3.2 3140,4866.93 3131.93,4875 v1@3123.73,4875 ; C17.1 3132.5,4045.5 3252.5,4045.5 C18.1 3431,4043 3515,4127 3607,4127 R10.1 ; C19.2 3497.88,4493 3559.88,4555 3720,4555 v1(3745,4530) ; FS8205A.7 FS8205A.6 3323.07,4695.59 3300,4718.66 3300,4756.93 3330.44,4787.36 3352.36,4787.36 v1(3355,4790) ; P1.6 P1.5 3450.59,4885.59 v1(3355,4790) ; 3980,6065 3955,6040 3955,5895 3995,5855 4270,5855 4285,5840 4285,5824.92 Q1.1 4293.72,5816.2 4393.8,5816.2 R20.1 ; v1@4006,5531 4006,5579 C30.1 ; v1(4025,4525) 4026,4526 C2.1 C1.1 C3.1 C4.1 ; IC4.2 3983.07,4085 3970,4071.93 v1(3970,3985) 3750,3985 3718,4017 C26.2 3613,4127 R10.1 ; v1(4170,4480.03) 4185.03,4480.03 4450,4745 ; C24.1 4274.5,4282.5 4274.5,4372.5 C25.2 4340,4375 4450,4485 4450,4745 ; 4454.09,5460.91 4454.09,5199.09 4451.49,5196.49 v1(4451.49,4960) 4451.49,4746.49 4450,4745 ; v1(3355,4790) 3850,4790 3900,4740 3900,4550 3880,4530 v1(3745,4530) ; R10.1 3610,4404.84 D4.1 3700,4425 3720.64,4445.64 3720.64,4505.64 v1(3745,4530)
  other v1: 4513.01,6025 4440,6030 4275,6035 4360,6035 4190,6044.67 4570,6050 4585,6125 4580,6200 4550,6275 4401.88,6300 4480,6300 4150,6305 4210,6305 4275,6305 4340,6305
LED: R4.2 STM32.2 | length 373
  Top Layer w7.87: STM32.2 3507.48,5272.04 3534.42,5272.04 3590,5216.46 v1(3590,5175)
  Bottom Layer w7.87: R4.2 3446.49,5248.51 3520,5175 v1(3590,5175)
NetC7_2: C7.2 R3.2 RST-MCU.1 STM32.7 | length 1377.7
  Top Layer w11.81: C7.2 3025,6023 3057,6055 v1(3160,6055) ; v1(3395,5370) 3395.84,5370.84 STM32.7
  Top Layer w13.78: R3.2 2949.41,5799.09 2949.41,5833.38 2922.8,5860 RST-MCU.1 2922.8,5952.8 2952,5982 C7.2
  Bottom Layer w11.81: v1(3160,6055) 3175,6055 3275,5955 3275,5815 3395,5695 v1(3395,5370)
NetC10_1: C10.1 STM32.5 X.2 | length 513.8
  Top Layer w11.81: STM32.5 3625.32,5331.47 3656.79,5300 X.2 3918.78,5300 3963.78,5345 3963.78,5368.96 C10.1@3964.82,5370
NetC11_1: C11.1 STM32.6 X.1 | length 534
  Top Layer w11.81: STM32.6 3611.16,5351.16 3760,5500 X.1 3890,5500 3924.84,5465.16 C11.1
NetC14_1: C14.1 C17.2 C18.2 D3.2 LM2596.1 | length 837
  Top Layer w70: v1(2875,4165.16) 3009.84,4165.16 C14.1 3015,4162.83 3036.22,4184.06 3155.19,4184.06 3214.83,4243.69 LM2596.1@3273.62,4243.69
  Bottom Layer w70: v1(2875,4165.16) D3.2 3086.84,4165.16 C17.2 3250,4122 C18.2
NetC21_1: C21.1 DW01A.6 FS8205A.2 FS8205A.3 J3.1 PIN.2 | length 1443.7
  Bottom Layer w13.78: PIN.2 2674.76,4724.76 2674.76,4809.76 2810,4945 3131.93,4945 3190,4886.93 J3.1 3190,4806.21 3203.11,4793.1 3231.93,4793.1 3240,4785.03 3240,4703.66 3231.93,4695.59 FS8205A.3 FS8205A.2
  Bottom Layer w70: PIN.2@2674.76,4724.76 2825,4724.76 2928.82,4620.94 2928.82,4570.97 2930,4569.79 C21.1@2930,4495
NetC21_2: C21.2 DW01A.5 R11.1 | length 235.9
  Bottom Layer w13.78: DW01A.5 2990,4557.12 3012,4535.12 C21.2 3011,4489 3011,4396 R11.1
NetC23_2: C23.2 R12.1 R13.2 STM32.18 | length 1315.1
  Top Layer w11.81: R12.1 2960,4750 2992,4782 C23.2 ; C23.2@3265,4790 v1(3265,4840) ; v1@3339.84,5465.16 STM32.18 ; v1(3340,5065) 3435,4970 v1(3435,4935)
  Top Layer w13.78: v1@3339.84,5465.16 v1(3340,5465)
  Bottom Layer w11.81: v1(3265,4840) 3325,4900 3400,4900 v1(3435,4935) ; v1(3340,5065) v1(3340,5465)
NetC33_2: ANT.1 C33.2 R21.1 | length 215.6
  Top Layer w11.81: v2(4290,6150) R21.1 4400.37,6150 ANT.1
  Bottom Layer w11.81: C33.2 4280,6225 4290,6215 v2(4290,6150)
NetD1_1: D1.1 USB.1 | length 427.6
  Top Layer w39.37: 2665,5149.76 2665,5235 2690,5260 v1(2720,5260)
  Bottom Layer w39.37: v1(2720,5260) 2930.16,5260 2955.32,5234.84 2961.22,5234.84 2975,5221.06 D1.1
NetD3_1: "POWER SW.2" D3.1 | length 287.5
  Bottom Layer w70: 2695,3960 2697.42,3962.42 2978.46,3962.42 2980,3963.96 D3.1
NetD4_2: D4.2 INDUCTOR.1 LM2596.2 | length 1223.3
  Top Layer w70: LM2596.2@3315,4171.93 3388.17,4171.93 3425,4208.76 v1(3425,4320) 3425,4330 3465,4370 3995,4370 4035.94,4329.06 4035.94,4182.2 INDUCTOR.1
  Bottom Layer w70: v1@3425,4331.26 3429.84,4336.1 D4.2
NetIC1_4: LM2596.4 R8.1 R10.2 | length 2558.1
  Top Layer w70: v1(3130,3935) 3130,3998.33 3171.01,4039.33 3300.35,4039.33 LM2596.4 ; R8.1 4550,4515 v1(4550,4465)
  Bottom Layer w70: v1(3130,3935) 3445,3935 3480,3900 3680,3900 ; R10.2 3610,3970 3680,3900 ; v1(4550,4465) 4550,3976.01 4473.99,3900 3680,3900
NetIC2_1: DW01A.1 FS8205A.4 | length 284.2
  Bottom Layer w13.78: DW01A.1 2952.6,4688.86 2966.46,4675 3083.37,4675 3105.67,4697.3 3105.67,4705.96 3120.06,4720.35 3155.79,4720.35 FS8205A.4
NetIC2_2: DW01A.2 R17.1 | length 123.4
  Bottom Layer w13.78: R17.1 2964.92,4845.08 2964.92,4815.08 2990,4790 DW01A.2
NetIC2_3: DW01A.3 FS8205A.5 | length 587.4
  Top Layer w13.78: v1(3075,4715) 3126.93,4663.07 3438.07,4663.07 3460,4685 v1(3460,4710)
  Bottom Layer w13.78: DW01A.3 3054.67,4739.06 3075,4718.73 v1(3075,4715) ; FS8205A.5 3383.98,4720.59 3459.41,4720.59 3460,4720 v1(3460,4710)
NetIC3_2: R16.1 TP4056.2 | length 144.8
  Top Layer w13.78: TP4056.2 3374.77,4457.5 3512.49,4457.5 R16.1
NetIC3_6: R15.2 TP4056.6 | length 1222.4
  Top Layer w13.78: v1(3095,4505) 3150.73,4505 TP4056.6 ; R15.2 3589.22,4636.49 3620,4605.71 v1(3620,4505)
  Bottom Layer w13.78: v1(3095,4505) 3065,4475 3065,4315 3135,4245 3450,4245 3540,4335 3540,4475 3570,4505 v1(3620,4505)
NetIC3_7: R14.2 TP4056.7 | length 217
  Top Layer w13.78: R14.2 3052.02,4396.49 3115.54,4460 TP4056.7
NetIC5_1: FS8205A.1 FS8205A.8 | length 226.8
  Bottom Layer w13.78: FS8205A.1 FS8205A.8
NetLED1_2: LED.2 R4.1 | length 612.4
  Top Layer w13.78: v1(3785,5115) 3842.24,5115 3855,5102.24 LED.2
  Bottom Layer w13.78: R4.1 3530,5320 3735,5115 v1(3785,5115)
NetLED2_2: LED2.2 R15.1 | length 483.8
  Top Layer w13.78: R15.1 3525,4565 3505,4585 3505,4672.44 3527.56,4695 3736.93,4695 3745,4686.93 LED2.2
NetLED3_2: LED3.2 R14.1 | length 116.2
  Top Layer w13.78: R14.1 2969.92,4320.08 2999.92,4320.08 3010,4310 LED3.2
NetLED4_1: "LED1 PPS.1" "LED2 PPS.1" R5.2 | length 419.2
  Top Layer w11.81: 4380,5800 4438.35,5800 4465,5826.65 v1(4465,5880) 4401.92,5880 4380,5901.92 4380,5945
  Bottom Layer w11.81: R5.2 4385,5945 4385,5904.56 4409.56,5880 v1@4460,5880
NetLED4_2: "LED1 PPS.2" "LED2 PPS.2" Q2.2 | length 308.7
  Top Layer w11.81: 4290,5800 4290,5845 4303.35,5858.35 4318.35,5858.35 v2(4335,5875) ; 4290,5945 4290,5881.92 4296.92,5875 v2@4330.74,5875
  Bottom Layer w11.81: Q2.2@4304.41,5942.4 Q2.2 4306.02,5945 4328.08,5945 4335,5938.08 v2(4335,5875)
NetP1_3: P1.3 R1.2 | length 150.7
  Bottom Layer w15.75: R1.2@3395,4993.51 3398.93,4989.57 3536.02,4989.57 P1.3 P1.3@3538.29,4983.88
NetP1_4: P1.4 R2.1 | length 163.7
  Top Layer w13.78: P1.4 3649.41,4995 3685,4995 3745,4935 R2.1
NetPW1_1: "LED 3V8.1" R9.2 | length 506.7
  Top Layer w13.78: 3840,4455 3843.54,4451.46 4001.82,4451.46 4077.24,4526.88 4077.24,4642.82 4158.51,4724.09 R9.2
NetPW2_1: "POWER 3V3.1" R18.1 | length 745
  Top Layer w13.78: v1(4322.99,4765) 4325.63,4767.64 4330.14,4767.64 4370,4807.5 4370,4810
  Bottom Layer w13.78: R18.1 3990,4362.76 4322.99,4695.75 v1(4322.99,4765)
NetQ1_2: "MOULE GPS-L80.10" Q1.2 | length 683.3
  Top Layer w13.78: v1(3895,6015) 3895,6030 3912.23,6047.23 4072.35,6047.23 4075.12,6050
  Bottom Layer w13.78: v1(3895,6015) 3895,5900 3970,5825 4172.4,5825 4200,5797.4 Q1.2
NetQ1_3: Q1.3 R19.1 R20.2 | length 199.7
  Bottom Layer w13.78: Q1.3 4292.98,5743.05 4394.54,5743.05 R20.2 4395.08,5743.51 4400,5738.59 4400,5715 4385,5700 R19.1@4385,5655
NetR19_2: R19.2 STM32.16 | length 1113.6
  Top Layer w11.81: STM32.16 3379.59,5538.48 3379.59,5573.84 3386.74,5580.99 3597.15,5580.99 3716.16,5700 4055,5700 4162.21,5592.79 v1(4250,5592.79) v1@4255,5592.79
  Bottom Layer w11.81: v1(4250,5592.79) 4282.79,5592.79 4308.51,5618.51 R19.2
NetU1_12: "MOULE GPS-L80.1" STM32.12 | length 1075.8
  Top Layer w13.78: 3464.88,6250 3610,6250 v1(3655,6205) ; STM32.12 3549.15,5469.27 3559.88,5480 v1(3559.88,5538.67)
  Bottom Layer w13.78: v1(3559.88,5538.67) 3530,5568.54 3530,5720 3680,5870 3680,6180 v1(3655,6205)
NetU1_13: "MOULE GPS-L80.2" STM32.13 | length 1052.4
  Top Layer w13.78: v1(3435,5445) 3435,5448.73 3438.27,5452 STM32.13 ; 3464.88,6150 3610,6150 v1(3635,6125)
  Bottom Layer w13.78: v1(3435,5445) 3460,5445 3485,5470 3485,5725 3605,5845 3605,5983.18 3635,6013.18 v1(3635,6125)
NetU1_17: "MOULE GPS-L80.7" STM32.17 | length 836.4
  Top Layer w11.81: STM32.17 3359.53,5594.53 3375,5610 3580,5610 3692.48,5722.48 3882.48,5722.48 3910,5750 4075.12,5750
PC14: C5.2 STM32.3 Y1.4 | length 699.8
  Top Layer w11.81: STM32.3 3558.85,5292.1 3675.96,5175 3855,5175 3925,5105 3925,5065 3932.01,5057.99 Y1.4 3973,5076.72 C5.2@3973,5145
PC15: C6.2 STM32.4 Y1.1 | length 919
  Top Layer w11.81: STM32.4 3613.21,5311.79 v1(3670,5255) ; v1(3895,4975) 3895,4940 3902.99,4932.01 Y1.1 3991.73,4856.73 3970,4835 3970,4800.18 C6.2
  Bottom Layer w11.81: v1(3670,5255) 3670,5210 3725,5155 3855,5155 3895,5115 v1(3895,4975)
PPS: "MOULE GPS-L80.6" Q2.3 | length 883
  Top Layer w13.78: 3464.88,5750 3604.89,5750 3704.89,5850 3835,5850 3985,6000 v1(4005,6000)
  Bottom Layer w13.78: v1(4005,6000) 4045,6000 4140,5905 Q2.3
RST: MODULE-SIM.3 STM32.40 | length 1458.7
  Top Layer w11.81: v1(3075,5385) 3075,5680 v1(3145,5750) ; v1(3080,5145) 3113.82,5111.18 3273.87,5111.18 3280.79,5118.1 STM32.40
  Bottom Layer w11.81: MODULE-SIM.3 2990,6155 3145,6000 v1(3145,5750) ; v1(3075,5385) 3075,5150 v1(3080,5145)
RXD: MODULE-SIM.4 STM32.30 | length 1008.5
  Top Layer w11.81: v1(3150,5700) 3114.12,5664.12 3114.12,5382.78 3125.08,5371.83 3151.92,5371.83 STM32.30
  Bottom Layer w11.81: MODULE-SIM.4 2890,6150 3080,5960 3080,5770 v1(3150,5700)
SCL2: STM32.25
SDA2: STM32.22
STM32_RX: MODULE-SIM.5 STM32.31 | length 1079.6
  Top Layer w11.81: STM32.31 3188.08,5351.16 3195,5358.08 3195,5605 v1(3160,5640)
  Bottom Layer w11.81: MODULE-SIM.5 2790,6155 3042.5,5902.5 3042.5,5757.5 v1(3160,5640)
SWDCLK: ST-LINK.3 STM32.37 | length 648.7
  Top Layer w11.81: v1(3115,5180) 3216.73,5180 STM32.37@3221.73,5185
  Bottom Layer w11.81: ST-LINK.3 3055,5490 3115,5430 v1(3115,5180)
SWDIO: ST-LINK.2 STM32.34 | length 734.8
  Top Layer w11.81: STM32.34 3222.84,5292.1 3230.74,5300 v1(3235,5300)
  Bottom Layer w11.81: ST-LINK.2 3156.03,5590 3260,5486.03 3260,5325 v1(3235,5300)
USB_N: STM32.32 USB.2 | length 579.1
  Top Layer w10: 3091.47,5331.47 STM32.32
  Top Layer w15: USB.2 2871.18,5111.18 3091.47,5331.47
USB_P: STM32.33 USB.3 | length 580.7
  Top Layer w10: 3105,5311.79 STM32.33
  Top Layer w15: USB.3 2880,5085.59 2880.59,5086.18 2881.54,5086.18 3105,5309.64
VBAT: "POWER SW.1" C20.2 C22.2 PIN.1 R11.2 R12.2 TP4056.5 | length 1307.8
  Top Layer w70: 2695,4160 v1(2695,4377.32) 2679.84,4392.48 2679.84,4510.16 PIN.1 2888.52,4520 ; R12.2@2953.51,4585 2888.52,4520 ; C20.2 2938,4520 2888.52,4520 ; R12.2 3145.37,4583.51 TP4056.5@3155.73,4573.15
  Bottom Layer w70: v1(2695,4377.32) 2875,4377.32 2875,4358 C22.2 ; 2885,4377.32 2920.83,4377.32 R11.2
VDDA: C31.2 R6.2 STM32.9 | length 808.9
  Top Layer w11.81: STM32.9 3507.21,5410.11 3569.89,5410.11 3570,5410 v1@3570.21,5410.21 ; v1(3580,5410.21) 3609.89,5410.21 3625.32,5425.64 3625.32,5575.31 3720,5670 3935,5670 3965,5640 3965,5583.99 C31.2
  Bottom Layer w11.81: v1(3580,5410.21) 3625.7,5410.21 3636.82,5421.33 R6.2@3636.82,5452.54
pads on no net: "MOULE GPS-L80.8" "MOULE GPS-L80.9" DW01A.4 IC4.4 STM32.1 STM32.8 STM32.10 STM32.11 STM32.14 STM32.15 STM32.21 STM32.26 STM32.27 STM32.28 STM32.29 STM32.38 STM32.39 STM32.41 STM32.42 STM32.43 STM32.45 STM32.46 USB.4

## Polygon pours and split planes (outlines as drawn)
GND on Top Layer "GND_L01_P020" (solid, remove dead copper, pour order 20): 2490,6410 4659.85,6410 4659.85,3825.15 4660,3825 2490,3825
no net on Top Layer "NONET_L01_P004" (solid, pour order 4): 2490,6405
no net on Top Layer "NONET_L01_P002" (solid, pour order 2): 2490,6405
no net on Top Layer "NONET_L01_P000" (solid, pour order 0): 2490,6405
GND on Bottom Layer "GND_L02_P022" (solid, remove dead copper, pour order 22): 4660,3825 2490,3825 2490,6410 4660,6410
no net on Bottom Layer "NONET_L02_P014" (solid, pour order 14): 4665,6410

## Keep-outs
Keep-Out Layer:
  lines w10: 4490,6480.65 4490,6410 4470,6410 2660,6410 2660,6480.7 ccw(c2575,6480) 2490,6480.65 2490,3750 ; 4490.15,6480.65 cw(c4575,6480) 4659.85,6480.7 4659.85,5747.54 4660,4442.55 4660,3770.05 4660,3754.35 ; 2490,3750 ccw(c2575,3750.7) 2659.99,3750.04 ; 2490,3750 2490,3750 ; 2660,3750.04 2660,3825 4490,3825 4490,3754.3 ; 2659.99,3750.04 2660,3750.04 ; 4490,3754.3 ccw(c4575,3755) 4660,3754.35 ; 4490,3754.3 4490,3754.3 ; 4660,3754.35 4660,3754.35

## Silkscreen, mask and mechanical layers (free items; w line width, h text height)
Top Overlay:
  drawing of 1603 lines, arcs and shapes, not listed
  text "3V3" at 2910,5745 h30 r270
  text "DIO" at 2910,5630 h30 r270
  text "GND" at 4305,5612 h30
  text "CLK" at 2915,5525 h30 r270
  text "GND" at 2913,5420 h30 r270
  text "3V3" at 4405,5075 h30 r180
  text "GND" at 2578.5,4845 h30
  text "VBAT" at 2786.5,4395 h30 r270

## Text inside footprints (layer, text, board x,y; h text height)
C13: Top Overlay "+" at 3006.83,5027.8 h30
C14: Top Overlay "+" at 3027.8,4154.65 h30 r270